# Allegro board pcb_final_2.brd
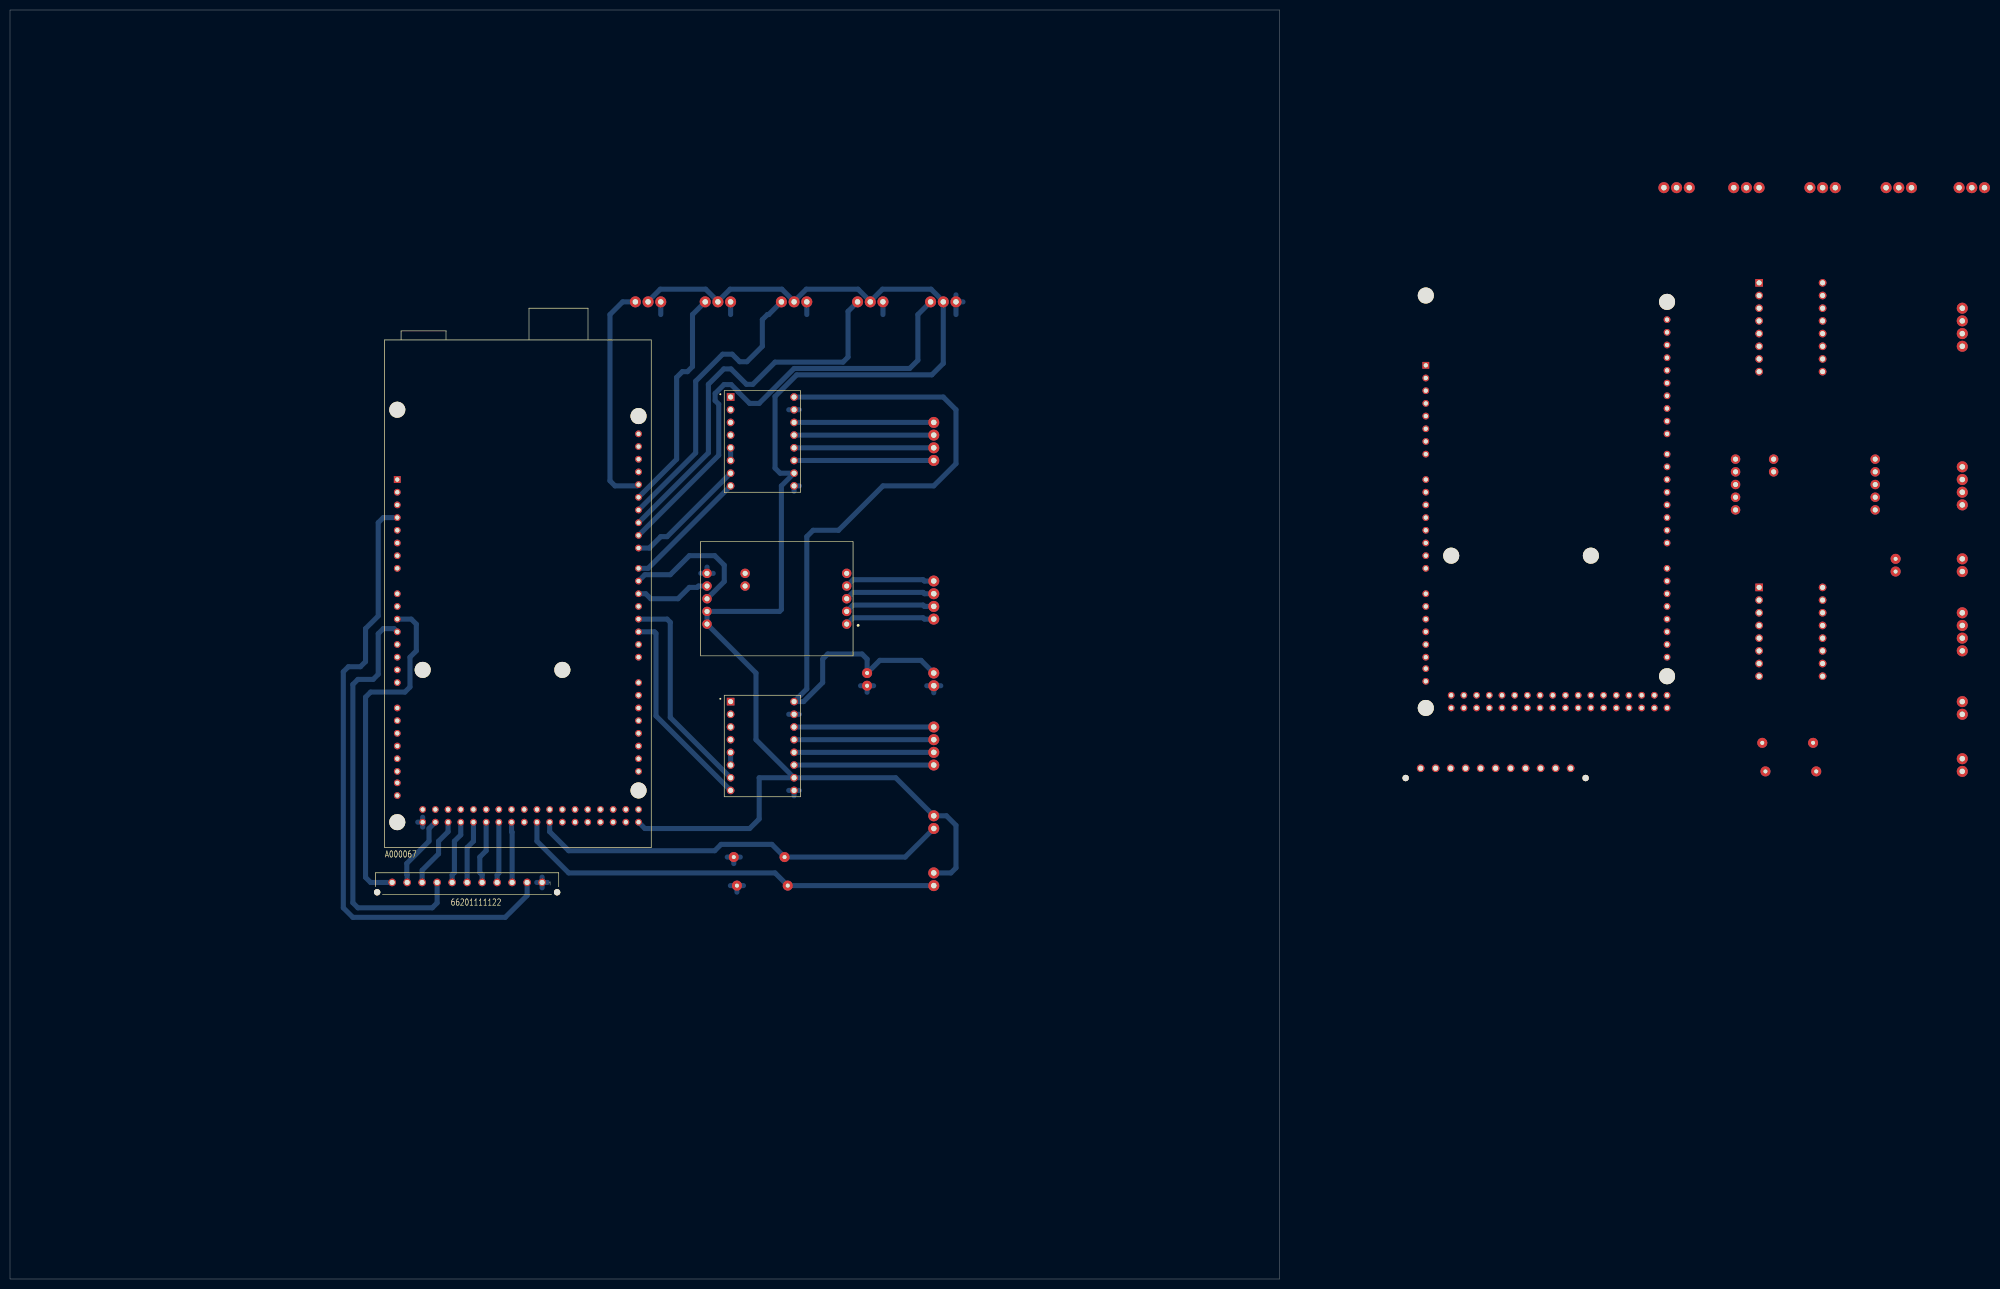
[diagram p0: board, top side]
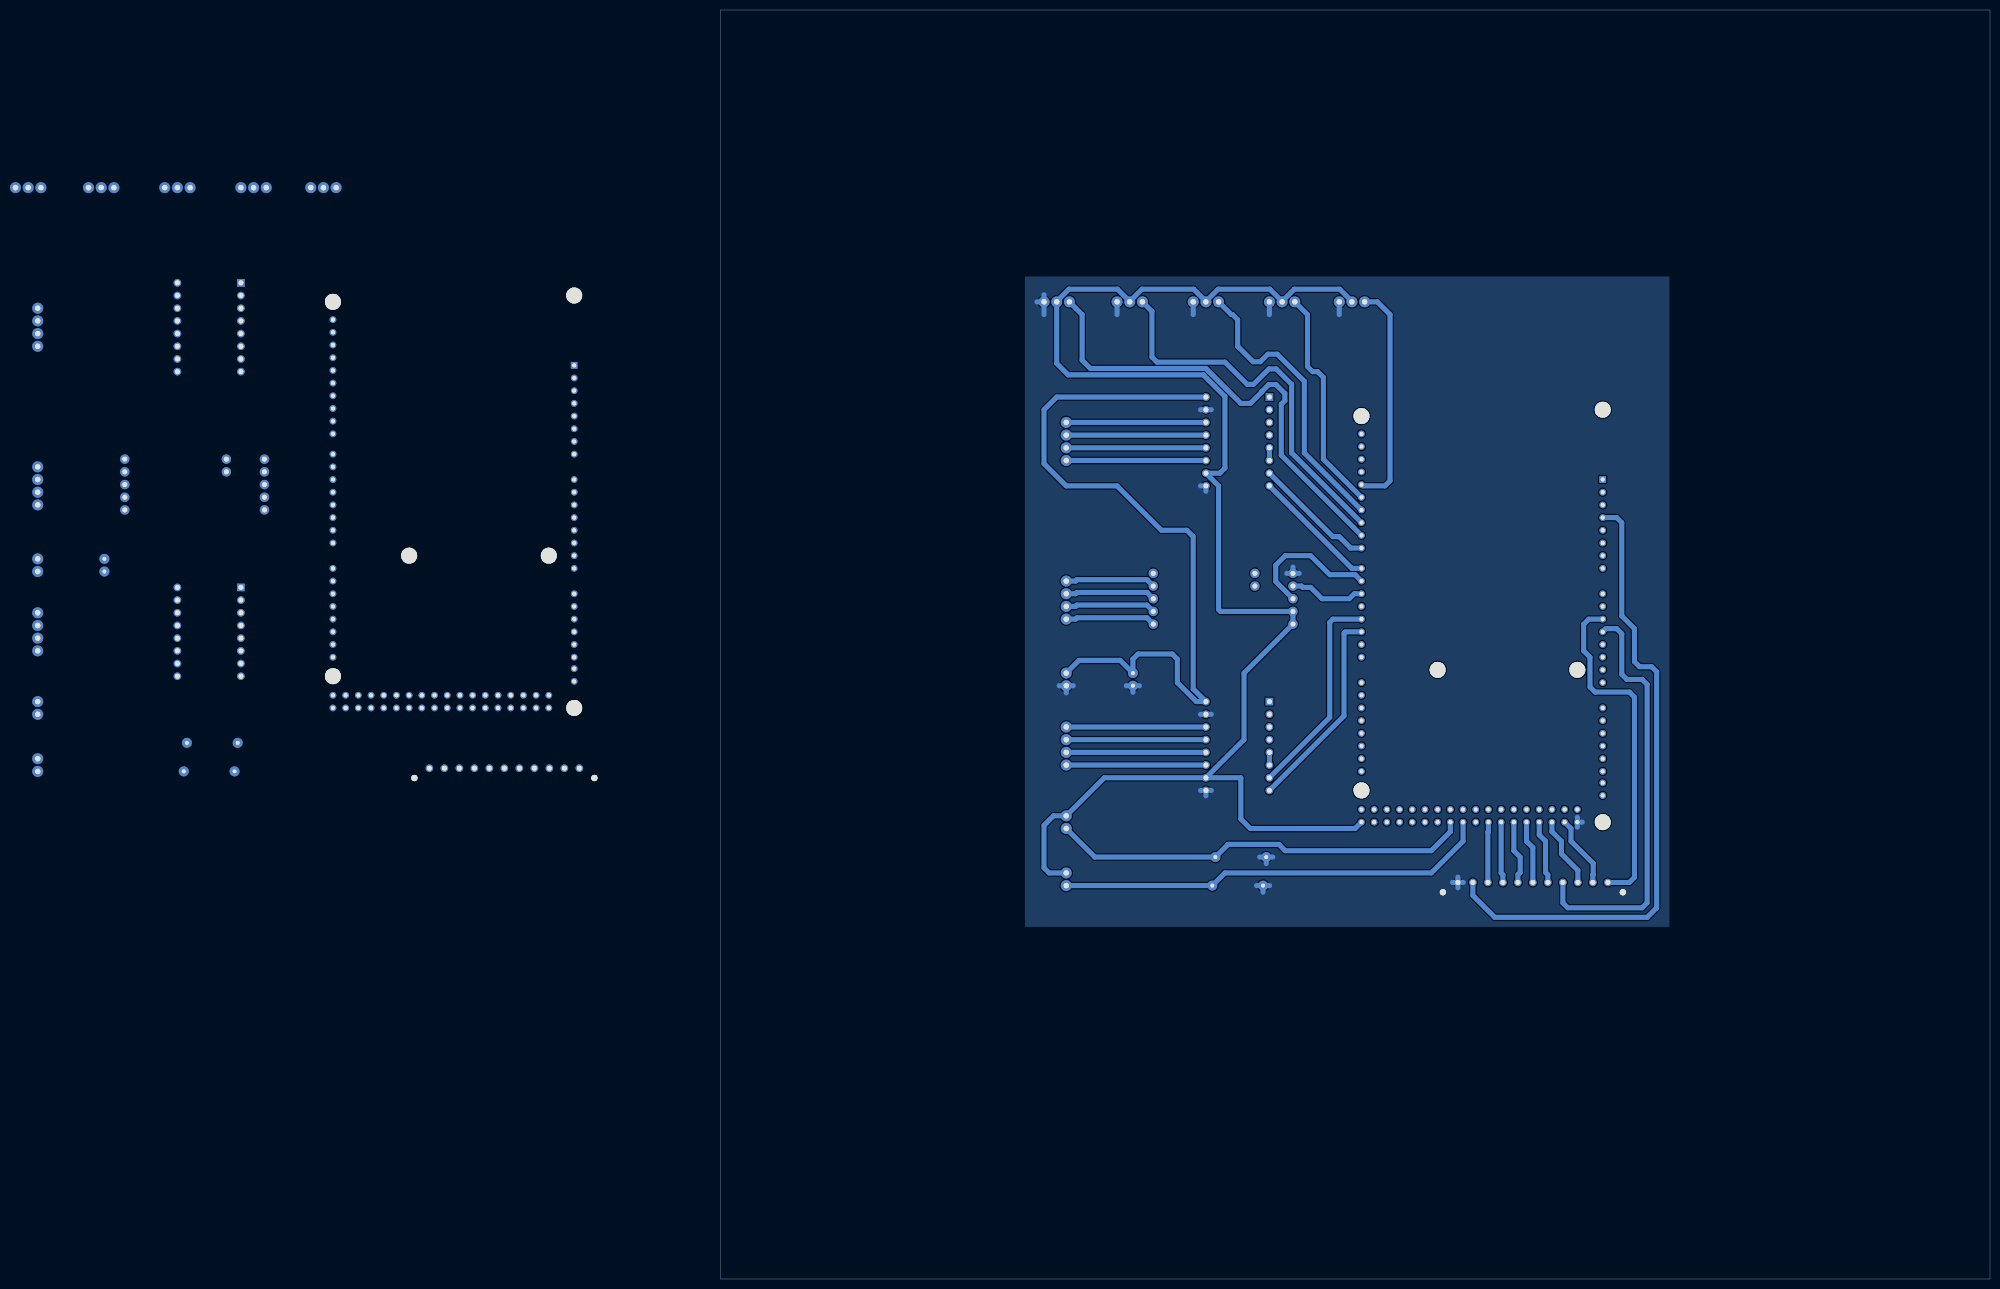
[diagram p1: board, bottom side, seen from below]

Outline 254 x 254 mm; copper layers: TOP, BOTTOM. Coordinates in mm from the lower left corner of the outline.
Outline path: 0,254 254,254 254,0 0,0 0,254

## Design rules (mm)
constraint set DEFAULT: min track width 1.016

## Placement (name value [footprint] x y rotation side)
ALED_ARDUINO_MEGA2560  A000067  [ARDUINO_A000067]  307.34 160.02 0 top
ALED_BALANCE  HEADER 4  [CON_04]  390.52 162.56 270 top
ALED_BOUTON_BLEU  HEADER 2  [CON_02]  390.52 104.14 270 top
ALED_BOUTON_ROUGE  HEADER 2  [CON_02]  390.52 115.57 270 top
ALED_C1  100u  [CAP_03]  377.19 141.6 90 top
ALED_DRIVER_BALANCE  SEN-13879  [SPARKFUN_SEN-13879]  358.14 160.02 180 top
ALED_DRIVER_MOTEUR1  A4988_STEPPER_MOTOR_DRIVER_CARRIER  [MODULE_A4988_STEPPER_MOTOR_]  356.24 190.5 0 top
ALED_DRIVER_MOTEUR2  A4988_STEPPER_MOTOR_DRIVER_CARRIER  [MODULE_A4988_STEPPER_MOTOR_]  356.24 129.54 0 top
ALED_ECRAN  1-11  [66201111122]  297.18 102.23 0 top
ALED_MOTEUR_PAP1  HEADER 4  [CON_04]  390.52 186.69 90 top
ALED_MOTEUR_PAP2  HEADER 4  [CON_04]  390.52 125.73 90 top
ALED_R1  10k  [RES_01]  360.68 107.31 180 top
ALED_R2  10k  [RES_01]  361.31 101.6 180 top
ALED_SERVO1  HEADER 3  [CON_03]  389.89 218.44 0 top
ALED_SERVO2  HEADER 3  [CON_03]  375.29 218.44 0 top
ALED_SERVO3  HEADER 3  [CON_03]  360.05 218.44 0 top
ALED_SERVO4  HEADER 3  [CON_03]  344.81 218.44 0 top
ALED_SERVO5  HEADER 3  [CON_03]  330.83 218.44 0 top
ALED_V_MOTEUR  HEADER 2  [CON_02]  390.52 144.15 270 top
ARDUINO_MEGA2560  A000067  [ARDUINO_A000067]  101.6 137.16 0 top
BALANCE  HEADER 4  [CON_04]  184.78 139.7 270 top
BOUTON_BLEU  HEADER 2  [CON_02]  184.78 81.28 270 top
BOUTON_ROUGE  HEADER 2  [CON_02]  184.78 92.71 270 top
C1  100u  [CAP_03]  171.45 118.75 90 top
DRIVER_BALANCE  SEN-13879  [SPARKFUN_SEN-13879]  152.4 137.16 180 top
DRIVER_MOTEUR1  A4988_STEPPER_MOTOR_DRIVER_CARRIER  [MODULE_A4988_STEPPER_MOTOR_]  150.5 167.64 0 top
DRIVER_MOTEUR2  A4988_STEPPER_MOTOR_DRIVER_CARRIER  [MODULE_A4988_STEPPER_MOTOR_]  150.5 106.68 0 top
ECRAN  1-11  [66201111122]  91.44 79.38 0 top
MOTEUR_PAP1  HEADER 4  [CON_04]  184.78 163.83 90 top
MOTEUR_PAP2  HEADER 4  [CON_04]  184.78 102.87 90 top
R1  10k  [RES_01]  154.94 84.45 180 top
R2  10k  [RES_01]  155.57 78.74 180 top
SERVO1  HEADER 3  [CON_03]  184.15 195.58 0 top
SERVO2  HEADER 3  [CON_03]  169.54 195.58 0 top
SERVO3  HEADER 3  [CON_03]  154.31 195.58 0 top
SERVO4  HEADER 3  [CON_03]  139.06 195.58 0 top
SERVO5  HEADER 3  [CON_03]  125.09 195.58 0 top
V_MOTEUR  HEADER 2  [CON_02]  184.78 121.28 270 top

## Library data of the parts
ALED_ARDUINO_MEGA2560 ARDUINO_MEGA2560 = A000067
ALED_BALANCE ALED_MOTEUR_PAP1 ALED_MOTEUR_PAP2 BALANCE MOTEUR_PAP1 MOTEUR_PAP2 = HEADER 4
ALED_BOUTON_BLEU ALED_BOUTON_ROUGE ALED_V_MOTEUR BOUTON_BLEU BOUTON_ROUGE V_MOTEUR = HEADER 2
ALED_C1 C1 = C
ALED_DRIVER_BALANCE DRIVER_BALANCE = SEN-13879
ALED_DRIVER_MOTEUR1 ALED_DRIVER_MOTEUR2 DRIVER_MOTEUR1 DRIVER_MOTEUR2 = A4988_STEPPER_MOTOR_DRIVER_CA
ALED_ECRAN ECRAN = 1-11
ALED_R1 ALED_R2 R1 R2 = R
ALED_SERVO1-ALED_SERVO5 SERVO1-SERVO5 = HEADER 3

## Footprints (pads in the part's own frame, mm; a bottom-side part is the same pattern mirrored in y, then rotated)
66201111122
  round 1.27 hole 1.27 unplated: (-18,-1.96) (18,-1.96)
  round 1.53 hole 1.02: 1(15,0) 2(12,0) 3(9,0) 4(6,0) 5(3,0) 6(0,0) 7(-3,0) 8(-6,0) 9(-9,0) 10(-12,0) 11(-15,0)
ARDUINO_A000067
  round 3.2 hole 3.2 unplated: (-24.13,36.83) (-24.13,-45.72) (-19.05,-15.24) (8.89,-15.24) (24.13,35.56) (24.13,-39.37)
  round 1.358 hole 0.85: 1(24.13,-10.16) 2(24.13,-7.62) 3(24.13,-5.08) 3V3(-24.13,15.24) 4(24.13,-2.54) 5(24.13,0) 5V_1(-24.13,12.7) 5V_2(24.13,-43.18) 5V_3(24.13,-45.72) 6(24.13,2.54) 7(24.13,5.08) 8(24.13,9.144) 9(24.13,11.684) 10(24.13,14.224) 11(24.13,16.764) 12(24.13,19.304) 13(24.13,21.844) 14(24.13,-17.78) 15(24.13,-20.32) 16(24.13,-22.86) 17(24.13,-25.4) 18(24.13,-27.94) 19(24.13,-30.48) 20(24.13,-33.02) 21(24.13,-35.56) 22(21.59,-43.18) 23(21.59,-45.72) 24(19.05,-43.18) 25(19.05,-45.72) 26(16.51,-43.18) 27(16.51,-45.72) 28(13.97,-43.18) 29(13.97,-45.72) 30(11.43,-43.18) 31(11.43,-45.72) 32(8.89,-43.18) 33(8.89,-45.72) 34(6.35,-43.18) 35(6.35,-45.72) 36(3.81,-43.18) 37(3.81,-45.72) 38(1.27,-43.18) 39(1.27,-45.72) 40(-1.27,-43.18) 41(-1.27,-45.72) 42(-3.81,-43.18) 43(-3.81,-45.72) 44(-6.35,-43.18) 45(-6.35,-45.72) 46(-8.89,-43.18) 47(-8.89,-45.72) 48(-11.43,-43.18) 49(-11.43,-45.72) 50(-13.97,-43.18) 51(-13.97,-45.72) 52(-16.51,-43.18) 53(-16.51,-45.72) AD0(-24.13,0) AD1(-24.13,-2.54) AD2(-24.13,-5.08) AD3(-24.13,-7.62) AD4(-24.13,-10.16) AD5(-24.13,-12.7) AD6(-24.13,-15.24) AD7(-24.13,-17.78) AD8(-24.13,-22.86) AD9(-24.13,-25.4) AD10(-24.13,-27.94) AD11(-24.13,-30.48) AD12(-24.13,-33.02) AD13(-24.13,-35.56) AD14(-24.13,-37.846) AD15(-24.13,-40.386) AREF(24.13,26.924) GND1(-24.13,10.16) GND2(-24.13,7.62) GND3(24.13,24.384) GND4(-19.05,-43.18) GND5(-19.05,-45.72) IOREF(-24.13,20.32) RESET(-24.13,17.78) RX0(24.13,-12.7) SCL(24.13,32.004) SDA(24.13,29.464) VIN(-24.13,5.08)
  rect 1.358x1.358 hole 0.85: NC(-24.13,22.86)
CAP_03
  round 2 hole 0.8: 1(0,0) 2(2.54,0)
CON_02
  round 2.2 hole 1.1: 1(0,0) 2(2.54,0)
CON_03
  round 2.2 hole 1.1: 1(0,0) 2(2.54,0) 3(5.08,0)
CON_04
  round 2.2 hole 1.1: 1(0,0) 2(2.54,0) 3(5.08,0) 4(7.62,0)
MODULE_A4988_STEPPER_MOTOR_
  rect 1.53x1.53 hole 1.02: 1(-6.35,8.89)
  round 1.53 hole 1.02: 2(-6.35,6.35) 3(-6.35,3.81) 4(-6.35,1.27) 5(-6.35,-1.27) 6(-6.35,-3.81) 7(-6.35,-6.35) 8(-6.35,-8.89) 9(6.35,-8.89) 10(6.35,-6.35) 11(6.35,-3.81) 12(6.35,-1.27) 13(6.35,1.27) 14(6.35,3.81) 15(6.35,6.35) 16(6.35,8.89)
RES_01
  round 2 hole 0.8: 1(0,0) 2(10.16,0)
SPARKFUN_SEN-13879
  round 1.88 hole 1.016: 1(-14.97,6.08) 2(-14.97,3.54) 3(-14.97,1) 4(-14.97,-1.54) 5(-14.97,-4.08) 6(12.97,-4.08) 7(12.97,-1.54) 8(12.97,1) 9(12.97,3.54) 10(12.97,6.08) 11(5.35,-1.54) 12(5.35,-4.08)

## Nets
VDD: ARDUINO_MEGA2560.5V_3 BOUTON_BLEU.1 BOUTON_ROUGE.1 DRIVER_BALANCE.9 DRIVER_BALANCE.10 DRIVER_MOTEUR1.10 DRIVER_MOTEUR2.10 SERVO1.2 SERVO2.2 SERVO3.2 SERVO4.2 SERVO5.2
0: ARDUINO_MEGA2560.GND5 C1.1 DRIVER_BALANCE.6 DRIVER_MOTEUR1.9 DRIVER_MOTEUR1.15 DRIVER_MOTEUR2.9 DRIVER_MOTEUR2.15 ECRAN.1 R1.2 R2.2 SERVO1.3 SERVO2.3 SERVO3.3 SERVO4.3 SERVO5.3 V_MOTEUR.2
1_1A: DRIVER_MOTEUR1.12 MOTEUR_PAP1.2
1_1B: DRIVER_MOTEUR1.11 MOTEUR_PAP1.1
1_2A: DRIVER_MOTEUR1.13 MOTEUR_PAP1.3
1_2B: DRIVER_MOTEUR1.14 MOTEUR_PAP1.4
2: ARDUINO_MEGA2560.2 DRIVER_MOTEUR2.8
2_1A: DRIVER_MOTEUR2.12 MOTEUR_PAP2.2
2_1B: DRIVER_MOTEUR2.11 MOTEUR_PAP2.1
2_2A: DRIVER_MOTEUR2.13 MOTEUR_PAP2.3
2_2B: DRIVER_MOTEUR2.14 MOTEUR_PAP2.4
3: ARDUINO_MEGA2560.3 DRIVER_MOTEUR2.7
3.3: ARDUINO_MEGA2560.3V3 ECRAN.2
5: ARDUINO_MEGA2560.5 DRIVER_BALANCE.7
6: ARDUINO_MEGA2560.6 DRIVER_BALANCE.8
7: ARDUINO_MEGA2560.7 DRIVER_MOTEUR1.8
8: ARDUINO_MEGA2560.8 DRIVER_MOTEUR1.7
9: ARDUINO_MEGA2560.9 SERVO1.1
10: ARDUINO_MEGA2560.10 SERVO2.1
11: ARDUINO_MEGA2560.11 SERVO3.1
12: ARDUINO_MEGA2560.12 SERVO4.1
13: ARDUINO_MEGA2560.13 SERVO5.1
22: ARDUINO_MEGA2560.22
24: ARDUINO_MEGA2560.24
26: ARDUINO_MEGA2560.26
28: ARDUINO_MEGA2560.28
35: ARDUINO_MEGA2560.35 BOUTON_ROUGE.2 R1.1
37: ARDUINO_MEGA2560.37 BOUTON_BLEU.2 R2.1
41: ARDUINO_MEGA2560.41 ECRAN.3(9)
43: ARDUINO_MEGA2560.43 ECRAN.4
45: ARDUINO_MEGA2560.45 ECRAN.5
47: ARDUINO_MEGA2560.47 ECRAN.6
49: ARDUINO_MEGA2560.49 ECRAN.7
51: ARDUINO_MEGA2560.51 ECRAN.9
53: ARDUINO_MEGA2560.53 ECRAN.10
A2: ARDUINO_MEGA2560.AD2 ECRAN.11
A3: ARDUINO_MEGA2560.AD3 ECRAN.8
ALED_0: ALED_ARDUINO_MEGA2560.GND5 ALED_C1.1 ALED_DRIVER_BALANCE.6 ALED_DRIVER_MOTEUR1.9 ALED_DRIVER_MOTEUR1.15 ALED_DRIVER_MOTEUR2.9 ALED_DRIVER_MOTEUR2.15 ALED_ECRAN.1 ALED_R1.2 ALED_R2.2 ALED_SERVO1.3 ALED_SERVO2.3 ALED_SERVO3.3 ALED_SERVO4.3 ALED_SERVO5.3 ALED_V_MOTEUR.2
ALED_1_1A: ALED_DRIVER_MOTEUR1.12 ALED_MOTEUR_PAP1.2
ALED_1_1B: ALED_DRIVER_MOTEUR1.11 ALED_MOTEUR_PAP1.1
ALED_1_2A: ALED_DRIVER_MOTEUR1.13 ALED_MOTEUR_PAP1.3
ALED_1_2B: ALED_DRIVER_MOTEUR1.14 ALED_MOTEUR_PAP1.4
ALED_2: ALED_ARDUINO_MEGA2560.2 ALED_DRIVER_MOTEUR2.8
ALED_2_1A: ALED_DRIVER_MOTEUR2.12 ALED_MOTEUR_PAP2.2
ALED_2_1B: ALED_DRIVER_MOTEUR2.11 ALED_MOTEUR_PAP2.1
ALED_2_2A: ALED_DRIVER_MOTEUR2.13 ALED_MOTEUR_PAP2.3
ALED_2_2B: ALED_DRIVER_MOTEUR2.14 ALED_MOTEUR_PAP2.4
ALED_3: ALED_ARDUINO_MEGA2560.3 ALED_DRIVER_MOTEUR2.7
ALED_3.3: ALED_ARDUINO_MEGA2560.3V3 ALED_ECRAN.2
ALED_5: ALED_ARDUINO_MEGA2560.5 ALED_DRIVER_BALANCE.7
ALED_6: ALED_ARDUINO_MEGA2560.6 ALED_DRIVER_BALANCE.8
ALED_7: ALED_ARDUINO_MEGA2560.7 ALED_DRIVER_MOTEUR1.8
ALED_8: ALED_ARDUINO_MEGA2560.8 ALED_DRIVER_MOTEUR1.7
ALED_9: ALED_ARDUINO_MEGA2560.9 ALED_SERVO1.1
ALED_10: ALED_ARDUINO_MEGA2560.10 ALED_SERVO2.1
ALED_11: ALED_ARDUINO_MEGA2560.11 ALED_SERVO3.1
ALED_12: ALED_ARDUINO_MEGA2560.12 ALED_SERVO4.1
ALED_13: ALED_ARDUINO_MEGA2560.13 ALED_SERVO5.1
ALED_22: ALED_ARDUINO_MEGA2560.22
ALED_24: ALED_ARDUINO_MEGA2560.24
ALED_26: ALED_ARDUINO_MEGA2560.26
ALED_28: ALED_ARDUINO_MEGA2560.28
ALED_35: ALED_ARDUINO_MEGA2560.35 ALED_BOUTON_ROUGE.2 ALED_R1.1
ALED_37: ALED_ARDUINO_MEGA2560.37 ALED_BOUTON_BLEU.2 ALED_R2.1
ALED_41: ALED_ARDUINO_MEGA2560.41 ALED_ECRAN.3(9)
ALED_43: ALED_ARDUINO_MEGA2560.43 ALED_ECRAN.4
ALED_45: ALED_ARDUINO_MEGA2560.45 ALED_ECRAN.5
ALED_47: ALED_ARDUINO_MEGA2560.47 ALED_ECRAN.6
ALED_49: ALED_ARDUINO_MEGA2560.49 ALED_ECRAN.7
ALED_51: ALED_ARDUINO_MEGA2560.51 ALED_ECRAN.9
ALED_53: ALED_ARDUINO_MEGA2560.53 ALED_ECRAN.10
ALED_A2: ALED_ARDUINO_MEGA2560.AD2 ALED_ECRAN.11
ALED_A3: ALED_ARDUINO_MEGA2560.AD3 ALED_ECRAN.8
ALED_BLACK: ALED_BALANCE.3 ALED_DRIVER_BALANCE.2
ALED_GREEN: ALED_BALANCE.1 ALED_DRIVER_BALANCE.4
ALED_N29102: ALED_DRIVER_MOTEUR1.5 ALED_DRIVER_MOTEUR1.6
ALED_N29116: ALED_DRIVER_MOTEUR2.5 ALED_DRIVER_MOTEUR2.6
ALED_RED: ALED_BALANCE.4 ALED_DRIVER_BALANCE.1
ALED_VALIM: ALED_C1.2 ALED_DRIVER_MOTEUR1.16(VMOT) ALED_DRIVER_MOTEUR2.16(VMOT) ALED_V_MOTEUR.1
ALED_VDD: ALED_ARDUINO_MEGA2560.5V_3 ALED_BOUTON_BLEU.1 ALED_BOUTON_ROUGE.1 ALED_DRIVER_BALANCE.9 ALED_DRIVER_BALANCE.10 ALED_DRIVER_MOTEUR1.10 ALED_DRIVER_MOTEUR2.10 ALED_SERVO1.2 ALED_SERVO2.2 ALED_SERVO3.2 ALED_SERVO4.2 ALED_SERVO5.2
ALED_WHITE: ALED_BALANCE.2 ALED_DRIVER_BALANCE.3
BLACK: BALANCE.3 DRIVER_BALANCE.2
GREEN: BALANCE.1 DRIVER_BALANCE.4
RED: BALANCE.4 DRIVER_BALANCE.1
VALIM: C1.2 DRIVER_MOTEUR1.16(VMOT) DRIVER_MOTEUR2.16(VMOT) V_MOTEUR.1
WHITE: BALANCE.2 DRIVER_BALANCE.3
N29102: DRIVER_MOTEUR1.5 DRIVER_MOTEUR1.6
N29116: DRIVER_MOTEUR2.5 DRIVER_MOTEUR2.6

Pads without a net: ALED_ARDUINO_MEGA2560 1 4 5V_1 5V_2 14 15 16 17 18 19 20 21 23 25 27 29 30 31 32 33 34 36 38 39 40 42 44 46 48 50 52 AD0 AD1 AD4 AD5 AD6 AD7 AD8 AD9 AD10 AD11 AD12 AD13 AD14 AD15 AREF GND1 GND2 GND3 GND4 IOREF NC RESET RX0 SCL SDA VIN; ALED_DRIVER_BALANCE 5 11 12; ALED_DRIVER_MOTEUR1 1 2 3 4; ALED_DRIVER_MOTEUR2 1 2 3 4; ARDUINO_MEGA2560 1 4 5V_1 5V_2 14 15 16 17 18 19 20 21 23 25 27 29 30 31 32 33 34 36 38 39 40 42 44 46 48 50 52 AD0 AD1 AD4 AD5 AD6 AD7 AD8 AD9 AD10 AD11 AD12 AD13 AD14 AD15 AREF GND1 GND2 GND3 GND4 IOREF NC RESET RX0 SCL SDA VIN; DRIVER_BALANCE 5 11 12; DRIVER_MOTEUR1 1 2 3 4; DRIVER_MOTEUR2 1 2 3 4

## Routing (per net, layer and track width the routed paths; a pad name or vN(x,y) marks a point on that pad's centre or on a via; arc(x,y) is an arc through that point)
VDD: length 309.2
  BOTTOM w1.016: 156.84,195.67 159.29,198.12 169.64,198.12 172.09,195.67 ; 156.84,195.67 SERVO3.2 ; 156.84,195.67 154.4,198.12 144.05,198.12 141.6,195.67 ; SERVO2.2 172.09,195.67 ; 172.09,195.67 174.53,198.12 184.24,198.12 186.69,195.67 SERVO1.2 186.69,183.26 184.4,180.97 157.37,180.97 153.03,176.64 153.03,162.31 154.05,161.29 DRIVER_MOTEUR1.10 154.31,158.75 154.31,133.99 153.94,133.62 DRIVER_BALANCE.9 DRIVER_BALANCE.10 149.22,121.28 149.22,107.95 DRIVER_MOTEUR2.10 ; SERVO4.2 141.6,195.67 ; 141.6,195.67 139.16,198.12 130.08,198.12 127.64,195.67 SERVO5.2 ; DRIVER_MOTEUR2.10 177.16,100.33 BOUTON_ROUGE.1 187.32,92.71 189.23,90.81 189.23,82.3 188.21,81.28 BOUTON_BLEU.1 ; DRIVER_MOTEUR2.10 149.86,100.33 149.86,92.08 147.96,90.17 127,90.17 ARDUINO_MEGA2560.5V_3
0: length 52.1
  BOTTOM w1.016: 143.47,84.45 R1.2 ; R1.2 146.09,84.45 ; R1.2 144.78,83.15 ; SERVO1.3 190.64,195.58 ; SERVO1.3 189.23,196.99 ; SERVO1.3 189.23,193.04 ; 155.77,113.03 DRIVER_MOTEUR2.15 157.92,113.03 ; 156.84,157.68 DRIVER_MOTEUR1.9 157.92,158.75 ; 144.11,78.74 R2.2 ; R2.2 146.72,78.74 ; R2.2 145.41,77.43 ; SERVO2.3 174.62,193.04 ; 138.18,141.24 DRIVER_BALANCE.6 ; DRIVER_BALANCE.6 140.68,141.24 ; DRIVER_BALANCE.6 139.43,142.49 ; 170.14,118.75 C1.1 ; C1.1 171.45,117.44 ; C1.1 172.76,118.75 ; V_MOTEUR.2 186.19,118.75 ; V_MOTEUR.2 183.38,118.75 ; V_MOTEUR.2 184.78,117.34 ; 155.77,97.79 DRIVER_MOTEUR2.9 ; DRIVER_MOTEUR2.9 157.92,97.79 ; DRIVER_MOTEUR2.9 156.84,96.72 ; ARDUINO_MEGA2560.GND5 82.55,92.42 ; ARDUINO_MEGA2560.GND5 81.57,91.44 ; ARDUINO_MEGA2560.GND5 82.55,90.46 ; SERVO5.3 130.18,193.04 ; 106.44,78.3 ECRAN.1 ; ECRAN.1 105.37,79.38 ; ECRAN.1 107.51,79.38 ; ECRAN.1 106.44,80.45 ; 159.38,195.58 159.38,193.04 ; SERVO4.3 144.15,193.04 ; 157.92,173.99 DRIVER_MOTEUR1.15 155.77,173.99
1_1A: length 27.9
  BOTTOM w1.016: MOTEUR_PAP1.2 DRIVER_MOTEUR1.12
1_1B: length 27.9
  BOTTOM w1.016: MOTEUR_PAP1.1 DRIVER_MOTEUR1.11
1_2A: length 27.9
  BOTTOM w1.016: MOTEUR_PAP1.3 DRIVER_MOTEUR1.13
1_2B: length 27.9
  BOTTOM w1.016: MOTEUR_PAP1.4 DRIVER_MOTEUR1.14
2: length 41.2
  BOTTOM w1.016: ARDUINO_MEGA2560.2 128.91,129.54 129.22,129.22 129.22,112.71 DRIVER_MOTEUR2.8
2_1A: length 27.9
  BOTTOM w1.016: MOTEUR_PAP2.2 DRIVER_MOTEUR2.12
2_1B: length 27.9
  BOTTOM w1.016: MOTEUR_PAP2.1 DRIVER_MOTEUR2.11
2_2A: length 27.9
  BOTTOM w1.016: MOTEUR_PAP2.3 DRIVER_MOTEUR2.13
2_2B: length 27.9
  BOTTOM w1.016: MOTEUR_PAP2.4 DRIVER_MOTEUR2.14
3: length 42.7
  BOTTOM w1.016: DRIVER_MOTEUR2.7 132.08,112.39 132.08,131.44 131.44,132.08 ARDUINO_MEGA2560.3
3.3: length 127.6
  BOTTOM w1.016: ARDUINO_MEGA2560.3V3 74.68,152.4 73.66,151.38 73.66,132.72 71.12,130.18 71.12,123.57 70.1,122.56 67.69,122.56 66.67,121.54 66.67,74.3 68.58,72.39 99.06,72.39 103.44,76.77 ECRAN.2
5: length 15.2
  BOTTOM w1.016: ARDUINO_MEGA2560.5 127.17,137.16 128.17,136.16 133.62,136.16 135.89,138.43 137.46,138.43 137.73,138.7 DRIVER_BALANCE.7
6: length 28.2
  BOTTOM w1.016: DRIVER_BALANCE.8 142.88,139.61 142.88,142.88 140.97,144.78 135.89,144.78 132.08,140.97 127,140.97 ARDUINO_MEGA2560.6
7: length 25.3
  BOTTOM w1.016: DRIVER_MOTEUR1.8 127.64,142.24 ARDUINO_MEGA2560.7
8: length 24.6
  BOTTOM w1.016: ARDUINO_MEGA2560.8 127.89,146.3 130.18,148.59 131.44,148.59 DRIVER_MOTEUR1.7
9: length 94.5
  BOTTOM w1.016: SERVO1.1 181.61,193.04 181.61,183.9 179.96,182.25 156.84,182.25 149.86,175.26 147.96,175.26 145.67,177.54 145.67,177.61 144.26,179.02 142.83,179.02 141.05,177.25 141.05,175.81 141.77,175.09 141.77,164.89 ARDUINO_MEGA2560.9
10: length 78.1
  BOTTOM w1.016: ARDUINO_MEGA2560.10 139.7,165.35 139.7,179.07 142.79,182.16 144.23,182.16 147.32,179.07 148.59,179.07 153.03,183.51 166.62,183.51 167.64,184.53 167.64,193.68 SERVO2.1
11: length 58.6
  BOTTOM w1.016: SERVO3.1 151.76,193.04 151.51,193.04 150.5,192.02 150.5,186.69 147.4,183.6 145.97,183.6 144.46,185.1 142.56,185.1 137.16,179.71 137.16,165.35 ARDUINO_MEGA2560.11
12: length 45.2
  BOTTOM w1.016: SERVO4.1 136.53,193.04 136.53,182.63 135.51,181.61 134.49,181.61 133.35,180.47 133.35,164.08 ARDUINO_MEGA2560.12
13: length 45.6
  BOTTOM w1.016: ARDUINO_MEGA2560.13 125.48,158.75 121.03,158.75 120.02,159.77 120.02,193.04 122.56,195.58 SERVO5.1
35: length 84.3
  BOTTOM w1.016: ARDUINO_MEGA2560.35 107.95,89.53 111.76,85.72 140.97,85.72 142.24,87 152.4,87 R1.1 179.07,84.45 BOUTON_ROUGE.2
37: length 86.9
  BOTTOM w1.016: ARDUINO_MEGA2560.37 105.41,87.63 111.76,81.28 153.03,81.28 R2.1 BOUTON_BLEU.2
41: length 12.1
  BOTTOM w1.016: ARDUINO_MEGA2560.41 100.33,89.53 100.44,89.43 ECRAN.3
43: length 12.2
  BOTTOM w1.016: ECRAN.4 97.44,80.9 97.79,81.25 ARDUINO_MEGA2560.43
45: length 12.8
  BOTTOM w1.016: ECRAN.5 94.44,80.9 93.98,81.36 93.98,84.45 95.25,85.72 ARDUINO_MEGA2560.45
47: length 12.6
  BOTTOM w1.016: ARDUINO_MEGA2560.47 92.71,87.63 91.44,86.36 ECRAN.6
49: length 12.8
  BOTTOM w1.016: ARDUINO_MEGA2560.49 90.17,88.9 88.9,87.63 88.9,81.36 88.44,80.9 ECRAN.7
51: length 14.2
  BOTTOM w1.016: ARDUINO_MEGA2560.51 87.63,89.53 85.72,87.63 85.72,85.09 82.44,81.81 ECRAN.9
53: length 14.5
  BOTTOM w1.016: ECRAN.10 79.44,80.9 79.38,80.97 79.38,83.19 83.82,87.63 83.82,90.17 ARDUINO_MEGA2560.53
A2: length 68.9
  BOTTOM w1.016: ARDUINO_MEGA2560.AD2 80.26,132.08 81.28,131.06 81.28,125.73 80.01,124.46 80.01,118.49 78.99,117.47 72.14,117.47 71.12,116.46 71.12,80.39 72.14,79.38 ECRAN.11
A3: length 84
  BOTTOM w1.016: ECRAN.8 85.44,75.28 84.45,74.3 69.6,74.3 68.58,75.31 68.58,119 69.6,120.02 72.64,120.02 73.66,121.03 73.66,129.16 74.68,130.18 76.83,130.18 ARDUINO_MEGA2560.AD3
BLACK: length 18.1
  BOTTOM w1.016: DRIVER_BALANCE.2 168.64,134.89 182.65,134.89 182.92,134.62 BALANCE.3
GREEN: length 18.1
  BOTTOM w1.016: DRIVER_BALANCE.4 168.64,139.97 182.65,139.97 182.92,139.7 BALANCE.1
RED: length 18.1
  BOTTOM w1.016: DRIVER_BALANCE.1 168.64,132.35 182.65,132.35 182.92,132.08 BALANCE.4
VALIM: length 154.2
  BOTTOM w1.016: DRIVER_MOTEUR1.16 186.69,176.53 189.23,173.99 189.23,163.19 184.78,158.75 174.62,158.75 165.74,149.86 160.66,149.86 159.38,148.59 159.38,118.11 DRIVER_MOTEUR2.16 158.75,115.57 162.56,119.38 162.56,124.08 163.58,125.09 170.43,125.09 171.45,124.08 171.45,121.28 173.99,123.83 182.25,123.83 V_MOTEUR.1
WHITE: length 18.1
  BOTTOM w1.016: BALANCE.2 182.92,137.16 182.65,137.43 168.64,137.43 DRIVER_BALANCE.3
N29102: length 2.5
  BOTTOM w1.016: DRIVER_MOTEUR1.6 DRIVER_MOTEUR1.5
N29116: length 2.5
  BOTTOM w1.016: DRIVER_MOTEUR2.5 DRIVER_MOTEUR2.6

## Copper pours and planes (outline as drawn; the poured copper is in the pictures)
0 on BOTTOM: 64.14,70.48 64.14,200.66 193.04,200.66 193.04,70.48
